# EAGLE board Infinity Mirror_002 (EAGLE 7.3.0)
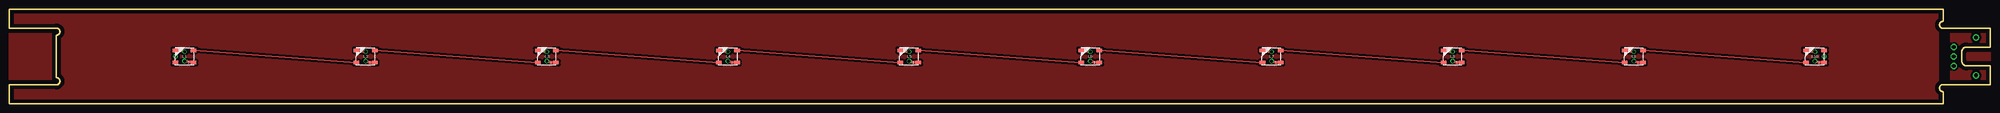
[diagram p0: board, top side]
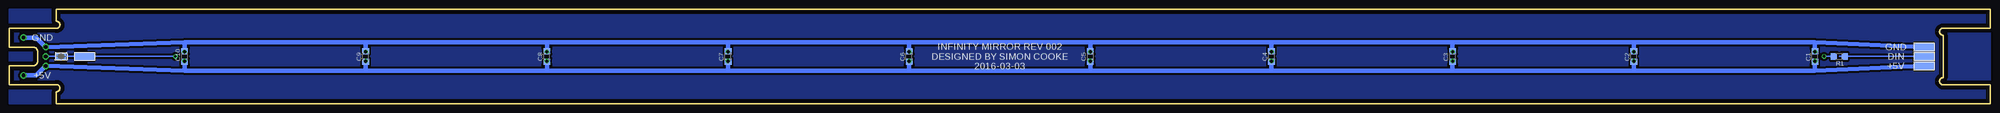
[diagram p1: board, bottom side, seen from below]

Size 533.4 x 25.4 mm. Coordinates in mm from the lower left corner, seen from the top.
Outline: 0,0 520.7,0 520.7,3.23 arc-180 520.7,5.13 533.4,5.13 533.4,10.16 527.05,10.16 arc-90 525.78,11.43 525.78,13.97 arc-90 527.05,15.24 533.4,15.24 533.4,20.27 520.7,20.27 arc-180 520.7,22.17 520.7,25.4 0,25.4 0,20.32 12.7,20.32 arc-180 12.7,18.41 12.7,6.99 arc-180 12.7,5.08 0,5.08 0,0
Copper layers (1*16): Top 0.035mm / dielectric 1.5mm / Bottom 0.035mm
Design rules "default *": minimum track width 10mil, minimum drill 30mil, track to track 8mil, track to pad 8mil, pad to pad 8mil, via to via 8mil, smd to smd 8mil, copper to edge 40mil, drill to drill 8mil, minimum pad ring 10mil, minimum via ring 8mil, stop-mask expansion 4mil, vias tented up to drill 100mil, thermal gap 10mil

## Footprints (pad centres in the part's own frame; a part is rotated, then mirrored left to right if it is on the bottom)
C1206 = smd 1.6 x 1.8: 1 -1.4,0; 2 1.4,0
1X03-CLEANBIG = drill 1.016 pad 1.676: 1 -2.54,0; 2 0,0; 3 2.54,0
1X01-CLEANBIG = drill 1.016 pad 1.778: 1 0,0
WS2812B = smd 1.5 x 0.9: 1-VDD 2.45,-1.65; 2-DOUT 2.45,1.65; 3-GND -2.45,1.65; 4-DIN -2.45,-1.65
5-1,8 = smd 1.829 x 5.08: 1 0,0
R1206 = smd 1.6 x 1.803: 1 -1.422,0; 2 1.422,0
SJ = smd 1.168 x 1.6: 1 -0.762,0; 2 0.762,0

## Placement (x,y rotation side)
C1  104  [C1206]  47.19,12.7 90 bottom
C2  104  [C1206]  95.96,12.7 90 bottom
C3  104  [C1206]  144.75,12.7 90 bottom
C4  104  [C1206]  193.52,12.7 90 bottom
C5  104  [C1206]  242.32,12.7 90 bottom
C6  104  [C1206]  291.08,12.7 90 bottom
C7  104  [C1206]  339.88,12.7 90 bottom
C8  104  [C1206]  388.65,12.7 90 bottom
C9  104  [C1206]  437.44,12.7 90 bottom
C10  104  [C1206]  486.21,12.7 90 bottom
JP1  [1X03-CLEANBIG]  523.57,12.7 90 top
JP2  [1X01-CLEANBIG]  529.59,7.62 0 top
JP3  [1X01-CLEANBIG]  529.59,17.78 0 top
L1  WS2812B  [WS2812B]  47.19,12.7 0 top
L2  WS2812B  [WS2812B]  95.96,12.7 0 top
L3  WS2812B  [WS2812B]  144.75,12.7 0 top
L4  WS2812B  [WS2812B]  193.52,12.7 0 top
L5  WS2812B  [WS2812B]  242.32,12.7 0 top
L6  WS2812B  [WS2812B]  291.08,12.7 0 top
L7  WS2812B  [WS2812B]  339.88,12.7 0 top
L8  WS2812B  [WS2812B]  388.65,12.7 0 top
L9  WS2812B  [WS2812B]  437.44,12.7 0 top
L10  WS2812B  [WS2812B]  486.21,12.7 0 top
PAD1  WIREPADSMD5-1,8  [5-1,8]  17.78,10.16 90 bottom
PAD2  WIREPADSMD5-1,8  [5-1,8]  17.78,12.7 90 bottom
PAD3  WIREPADSMD5-1,8  [5-1,8]  17.78,15.24 90 bottom
PAD4  WIREPADSMD5-1,8  [5-1,8]  513.08,12.7 270 bottom
R1  331  [R1206]  40.64,12.7 180 bottom
SJ2  [SJ]  519.43,12.7 180 bottom

## Library data of the parts
C1-C10 JP1-JP3 L1-L10 = adafruit
PAD1-PAD4 = wirepad
R1 = resistor
SJ2 = jumper

## Nets
N$1: L2.2-DOUT L3.4-DIN
N$2: L3.2-DOUT L4.4-DIN
N$3: L4.2-DOUT L5.4-DIN
N$4: L5.2-DOUT L6.4-DIN
N$5: L6.2-DOUT L7.4-DIN
N$6: L1.2-DOUT L2.4-DIN
N$7: L7.2-DOUT L8.4-DIN
N$8: L8.2-DOUT L9.4-DIN
N$9: C1.1 C2.1 C3.1 C4.1 C5.1 C6.1 C7.1 C8.1 C9.1 C10.1 JP1.1 JP2.1 L1.1-VDD L2.1-VDD L3.1-VDD L4.1-VDD L5.1-VDD L6.1-VDD L7.1-VDD L8.1-VDD L9.1-VDD L10.1-VDD PAD1.1
N$10: PAD2.1 R1.1
N$11: C1.2 C2.2 C3.2 C4.2 C5.2 C6.2 C7.2 C8.2 C9.2 C10.2 JP1.3 JP3.1 L1.3-GND L2.3-GND L3.3-GND L4.3-GND L5.3-GND L6.3-GND L7.3-GND L8.3-GND L9.3-GND L10.3-GND PAD3.1
N$12: L9.2-DOUT L10.4-DIN
N$14: L10.2-DOUT PAD4.1 SJ2.1
N$19: JP1.2 SJ2.2
N$20: L1.4-DIN R1.2

## Tracks (layer width: path | path; a pad name or v marks a point on that pad's centre or on a via)
N$1
  Top 0.406: L2.2-DOUT L3.4-DIN
N$2
  Top 0.406: L3.2-DOUT L4.4-DIN
N$3
  Top 0.406: L4.2-DOUT L5.4-DIN
N$4
  Top 0.406: L5.2-DOUT L6.4-DIN
N$5
  Top 0.406: L6.2-DOUT L7.4-DIN
N$6
  Top 0.406: L1.2-DOUT L2.4-DIN
N$7
  Top 0.406: L7.2-DOUT L8.4-DIN
N$8
  Top 0.406: L8.2-DOUT L9.4-DIN
N$9  (via drill 0.8)
  Top 0.813: v291.08,11.43 L6.1-VDD | v242.32,11.43 L5.1-VDD | v193.52,11.43 L4.1-VDD | v144.75,11.43 L3.1-VDD | v95.96,11.43 L2.1-VDD | v339.88,11.43 L7.1-VDD | v388.64,11.43 L8.1-VDD | v437.44,11.43 L9.1-VDD | L1.1-VDD v47.19,11.43 | v486.21,11.43 L10.1-VDD
  Bottom 1.27: C6.1 v291.08,11.43 291.08,8.89 | C4.1 v193.52,11.43 193.52,8.89 | C3.1 v144.75,11.43 144.75,8.89 | C2.1 v95.96,11.43 95.96,8.89 | C7.1 v339.88,11.43 339.88,8.89 | C9.1 v437.44,11.43 437.44,8.89 | C1.1 v47.19,11.43 47.19,8.89 | 95.96,8.89 47.19,8.89 | 95.96,8.89 144.75,8.89 | C10.1 v486.21,11.43 486.21,8.89 | 486.21,8.89 437.44,8.89 | 144.75,8.89 193.52,8.89 | 193.52,8.89 242.32,8.89 | 242.32,8.89 291.08,8.89 | 47.19,8.89 PAD1.1 | 291.08,8.89 339.88,8.89 | 339.88,8.89 388.62,8.89 | 388.62,8.89 437.44,8.89 | 242.32,8.89 v242.32,11.43 C5.1 | 388.62,8.89 v388.64,11.43 C8.1 | 486.21,8.89 JP1.1 526.11,7.62 JP2.1
N$10
  Bottom 0.406: PAD2.1 R1.1 40.64,12.7
N$11  (via drill 0.8)
  Top 0.813: L9.3-GND v437.44,13.97 | L7.3-GND v339.88,13.97 | L6.3-GND v291.08,13.97 | L5.3-GND v242.32,13.97 | L4.3-GND v193.52,13.97 | L3.3-GND v144.75,13.97 | L2.3-GND v95.96,13.97 | L8.3-GND v388.64,13.97 | v47.19,13.97 L1.3-GND | L10.3-GND v486.21,13.97
  Bottom 1.27: C9.2 v437.44,13.97 437.44,16.51 | C7.2 v339.88,13.97 339.88,16.51 | C6.2 v291.08,13.97 291.08,16.51 | C5.2 v242.32,13.97 242.32,16.51 | C4.2 v193.52,13.97 193.52,16.51 | C3.2 v144.75,13.97 144.75,16.51 | C2.2 v95.96,13.97 95.96,16.51 | C8.2 v388.64,13.97 388.64,16.51 | C1.2 v47.19,13.97 47.19,16.51 | C10.2 v486.21,13.97 486.21,16.51 | 47.19,16.51 95.96,16.51 | 95.96,16.51 144.75,16.51 | 144.75,16.51 193.52,16.51 | 193.52,16.51 242.32,16.51 | 242.32,16.51 291.08,16.51 | PAD3.1 47.19,16.51 | 291.08,16.51 339.88,16.51 | 339.88,16.51 388.64,16.51 | 388.64,16.51 437.44,16.51 | 437.44,16.51 486.21,16.51 | 486.21,16.51 JP1.3 526.11,17.78 JP3.1
N$12
  Top 0.406: L9.2-DOUT L10.4-DIN
N$14  (via drill 0.8)
  Top 0.406: L10.2-DOUT v488.66,12.7
  Bottom 0.406: SJ2.1 PAD4.1 v488.66,12.7
N$15
  pour Top (isolate 0.508): 0,25.4 519.43,25.4 519.43,0 0,0
N$16
  pour Bottom (isolate 0.508): 0,25.4 533.4,25.4 533.4,0 0,0
N$17
  pour Top (isolate 0.508): 522.73,20.32 522.73,5.08 533.4,5.08 533.4,20.32
N$19
  Bottom 0.406: SJ2.2 JP1.2
N$20  (via drill 0.8)
  Top 0.406: L1.4-DIN v44.74,12.7
  Bottom 0.406: R1.2 v44.74,12.7

## Text on the board
bPlace: GND | GND | DIN | INFINITY MIRROR REV 002 / DESIGNED BY SIMON COOKE / 2016-03-03 | +5V | +5V